# Altium PCB WIFISocketDemo.PcbDoc
Units mil, origin at the board's own origin, x right, y up, seen from the top; angles counter-clockwise.
Board outline 6000 x 4000 mil, 2 copper layers (Top Layer, Bottom Layer); 29 components, 22 nets, 88 pads, 0 vias.
Unrouted connection lines stored in the file: 58.
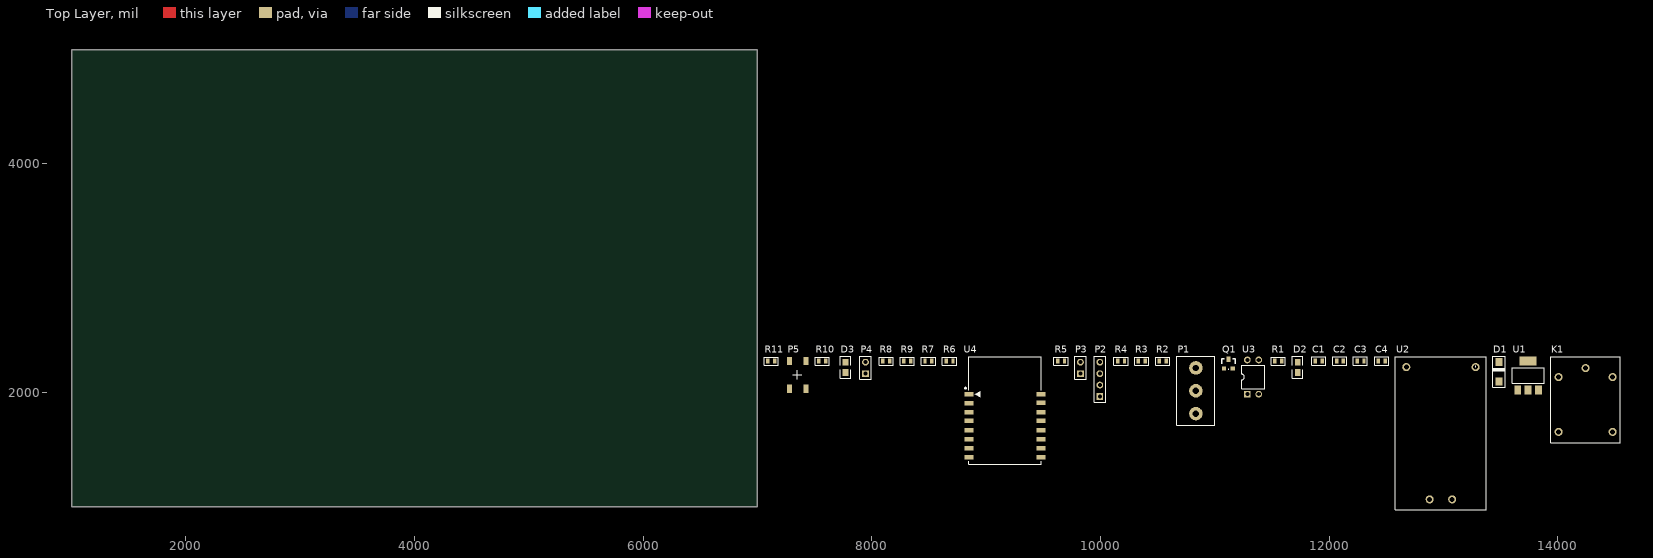
[diagram p0: Top Layer view]
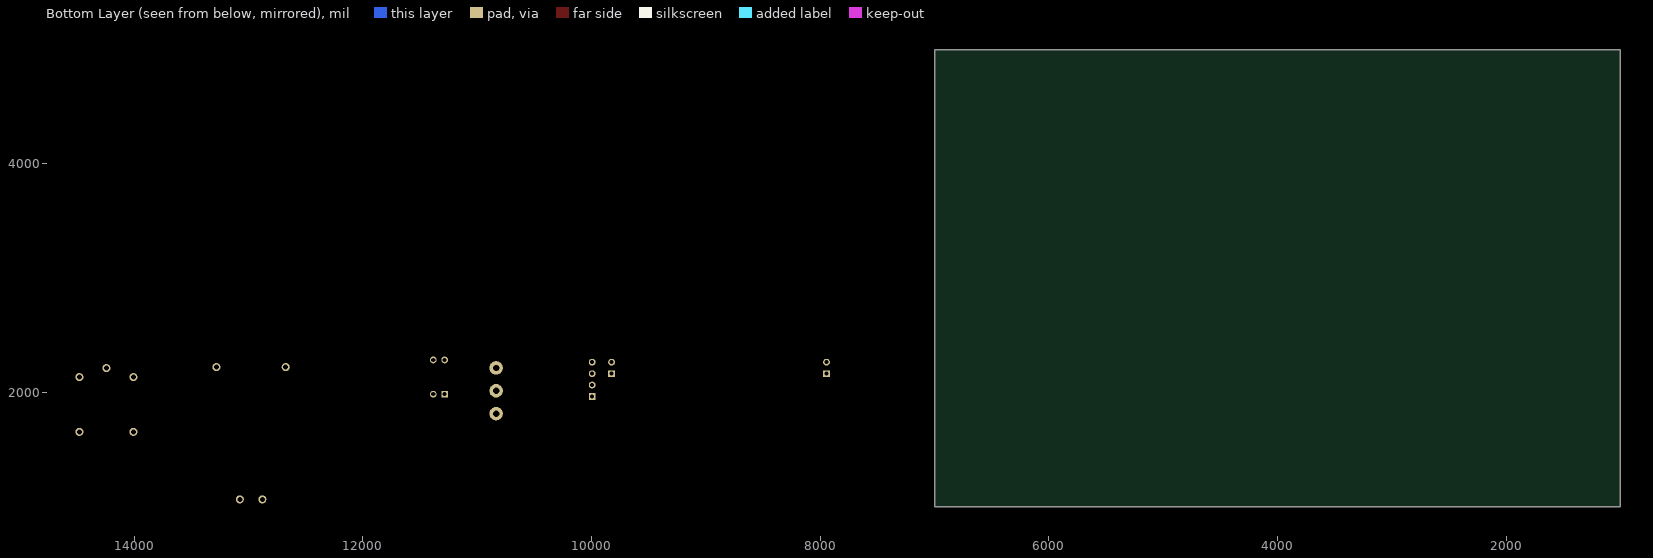
[diagram p1: Bottom Layer view, seen from below]

## Layer stack, top to bottom
Top Layer: signal copper 1.4
Dielectric: dielectric 12.6, FR-4, Dk 4.8
Bottom Layer: signal copper 1.4

## Board outline
1000,1000 7000,1000 7000,5000 1000,5000

## Design rules (kind name [scope] priority, off if disabled: settings)
Clearance [All] p1: gap=10
PolygonConnect [All] p1: connectstyle=Relief reliefconductorwidth=10 reliefentries=4 polygonreliefangle="90 Angle"
RoutingVias [All] p1: holewidth=28 width=50 viastyle="Through Hole" minholewidth=28 minwidth=50 maxholewidth=28 maxwidth=50
SilkscreenOverComponentPads [All] p1: minsilkscreentomaskgap=10
SolderMaskExpansion [All] p1: expansion=4
TestPointUsage [All] p1: valid=0 allowmultiple=FALSE
Testpoint [All] p1: side=15 testpointundercomponent=TRUE minsize=40 maxsize=100 preferedsize=60 minholesize=0 maxholesize=40 preferedholesize=32 testpointgrid=1 style=1023 order=0123456789
Width [All] p1: maxlimit=10 minlimit=10 preferedwidth=10
23 further rules are at their usual default settings.

## Components (designator, comment, footprint, x,y, rotation, side; value= is the part's Value field where it differs from the comment)
C1 "0.1uF" 0603A 11880,2275 r0 top
C2 "10uF" 0603A 12065,2275 r0 top
C3 "10uF" 0603A 12245,2275 r0 top
C4 "0.1uF" 0603A 12430,2275 r0 top
D1 "IN4007" 1N4007 13485,2095 r90 top
D2 "LED" 0805 11725,2175 r90 top
D3 "LED" 0805 7770,2175 r90 top
K1 "Relay" Relay 14480,1655 r0 top
P1 "Connector" KF128-3P 10835,1815 r90 top
P2 "UART" HDR1X4 9995,1965 r90 top
P3 "REST" HDR1X2 9825,2165 r90 top
P4 "DOWN" HDR1X2 7945,2165 r90 top
P5 "Button" BUTTON 7350,2155 r90 top
Q1 "S0805" SOT23 11120,2250 r0 top
R1 "Res" 0603R 11525,2275 r0 top
R2 "Res" 0603R 10515,2275 r0 top
R3 "Res" 0603R 10330,2275 r0 top
R4 "Res" 0603R 10150,2275 r0 top
R5 "Res" 0603R 9625,2275 r0 top
R6 "Res" 0603R 8650,2275 r0 top
R7 "Res" 0603R 8465,2275 r0 top
R8 "Res" 0603R 8095,2275 r0 top
R9 "Res" 0603R 8280,2275 r0 top
R10 "Res" 0603R 7535,2275 r0 top
R11 "Res" 0603R 7090,2275 r0 top
U1 "AMS1117-3.3" SOT223 13650,2020 r0 top
U2 "HLK-PM01" HLK_PM01 12880,1065 r90 top
U3 "TLP521" DIP-4 11335,2135 r0 top
U4 "ESP12N" ESP_12 8850,1985 r0 top

## Footprints (in the part's own frame and the unit in brackets; to place one, negate y for a bottom-side part, rotate by r counter-clockwise, add the part's x,y. Pads: shape width x height; smd on the part's side, far side on the other; paste and mask are expansions set on the pad)
1N4007 [mil]
  rect 70x60 smd: 1(0,0) 2(170,0)
  silkscreen extent -51,-55 220,55
0603A [mil]
  rect 30x40 smd: 1(0.31,0.44) 2(60.31,0.44)
  silkscreen extent -31,-35 91,37
0603R [mil]
  rect 30x40 smd: 1(0.66,0.41) 2(60.66,0.41)
  silkscreen extent -31,-35 93,35
0805 [mil]
  rect 60x50 smd: 1(0,0) 2(90,0)
  silkscreen extent -50,-45 140,45
BUTTON [mm] "[CHECK][9/6][PIN]"
  rect 1.8x1.1 smd: 1(-3.1,1.8) 1(3.1,1.8) 2(-3.1,-1.9) 2(3.1,-1.9)
  silkscreen extent -1,-1 1,1
DIP-4 [mm] "DIP; 4 Leads; Row Spacing 7.62 mm; Pitch 2.54 mm"
  rect 1.5x1.5 hole 0.9: 1(-1.27,-3.81)
  round 1.5 hole 0.9: 2(1.27,-3.81) 3(1.27,3.81) 4(-1.27,3.81)
  silkscreen extent -2.55,-2.65 2.55,2.65
ESP_12 [mm]
  rect 2x1 smd: 1(0,0) 2(0,-1.97) 3(0,-3.97) 4(0,-5.94) 5(0,-7.98) 6(0,-9.99) 7(0,-11.98) 8(0,-13.99) 9(16,-14.03) 10(16,-11.99) 11(16,-10.03) 12(16,-8.01) 13(16,-5.95) 14(16,-3.97) 15(16,-1.95) 16(16,0.03)
  silkscreen extent -0.91,-15.57 16.08,8.37
HDR1X2 [mm] "Connector; Header; 2 Position"
  rect 1.5x1.5 hole 0.9: 1(0,0)
  round 1.5 hole 0.9: 2(2.54,0)
  silkscreen extent -1.27,-1.27 3.81,1.27
HDR1X4 [mm] "Connector; Header; 4 Position"
  rect 1.5x1.5 hole 0.9: 1(0,0)
  round 1.5 hole 0.9: 2(2.54,0) 3(5.08,0) 4(7.62,0)
  silkscreen extent -1.27,-1.27 8.89,1.27
HLK_PM01 [mm] "[CHECK][9/5][SIZE][PIN]"
  round 1.8 hole 1.1: 1(0,0) 2(0,-5) 3(29.4,5.2) 4(29.4,-10.2)
  silkscreen extent -2.3,-12.6 31.7,7.6
KF128-3P [mm] "5.08mm"
  round 3 hole 1.4: 1(0,0) 2(5.08,0) 3(10.16,0)
  round 1 on Top Overlay: 4(-1.2,-3.1)
  silkscreen extent -2.54,-4.2 12.7,4.2
Relay [mm]
  round 1.8 hole 1.1: 1(-12,0) 2(0,0) 3(-6,14.2) 4(0,12.2) 5(-12,12.2)
  silkscreen extent -13.75,-2.4 1.75,16.7
SOT23 [mil]
  rect 36x36 smd: B(-37.5,-40) E(37.5,-40)
  rect 36x50 smd: C(0.5,40)
  silkscreen extent -58,-45 58,45
SOT223 [mil]
  rect 59x79 smd: 1(0,0) 2(90.55,0) 3(181.1,0)
  rect 150x79 smd: 4(89.88,253.54)
  silkscreen extent -49,59 231,197

## Part data
C1 C4: library part CAP, "Capacitor"
C2 C3: library part CAPACITOR, "Capacitor"
D1: "整流二极管"
K1: "SPDT Relay"
P1: library part Socket, "220V插座焊盘"
P2: "UART下载接口"
P3 P4: library part "Header 2", "Header, 2-Pin"
P5: "按键"
Q1: "NPN"
R1 R2 R3 R4 R5 R6 R7 R8 R9 R10 R11: "Resistor"
U1: "5Vת3V"
U2: "220V AC转5V DC模块"
U3: library part Optoisolator, "光耦"
U4: "ESP12N无线模块"

## Nets (pads, with @x,y where several pads share a name; then routed paths per layer and width w, separated by ;. In a path a pad name is that pad's centre, name@x,y a point inside that pad or via, vN(x,y) a via of type N, cw(c..) or ccw(c..) an arc to the next point about the centre after c; other vN are vias at no path point)
+5V: C1.1 C2.1 D1.2 K1.4 P2.1 U1.3 U2.3 U3.4
ACL: K1.3 P1.2 U2.1
ACN: P1.1 U2.2
GND: C1.2 C2.2 C3.2 C4.2 P2.4 P3.1 P4.1 P5.2 Q1.E R1.1 R3.1 R4.1 R8.2 U1.1 U2.4 U4.9
NetD1_1: D1.1 K1.5 Q1.C
NetD2_2: D2.2 R1.2
NetD3_2: D3.2 R11.2
NetP2_2: P2.2 U4.15
NetP2_3: P2.3 U4.16
NetP3_2: P3.2 R5.1 U4.1
NetP4_2: P4.2 R7.2 R9.2
NetQ1_B: Q1.B R2.2
NetR2_1: R2.1 R4.2 U3.3
NetR3_2: R3.2 U3.2
NetR6_2: R6.2 U4.3
NetR7_1: R7.1 U4.12
NetR8_1: R8.1 U4.10
SW_BUTTON: P5.1 R10.1 U4.13
SW_CNT: U3.1 U4.14
SW_LED: R11.1 U4.11
SWL: K1.1 P1.3
VCC_3.3V: C3.1 C4.1 D2.1 D3.1 R5.2 R6.1 R9.1 R10.2 U1.2 U4.8
pads on no net: K1.2 P1.4 U1.4 U4.2 U4.4 U4.5 U4.6 U4.7

## Text inside footprints (layer, text, board x,y; h text height)
U4: Mechanical 13 "CUTOUT POLYGON" at 8855,2275 h10; Mechanical 13 "ANTENNA AREA" at 8855,2295 h10